# Altium PCB PCB1.PcbDoc
Units mm, origin at the board's own origin, x right, y up, seen from the top; angles counter-clockwise.
Board outline 80.5 x 60.5 mm, 2 copper layers (Top Layer, Bottom Layer); 35 components, 26 nets, 180 pads, 4 vias.
Unrouted connection lines stored in the file: 2.
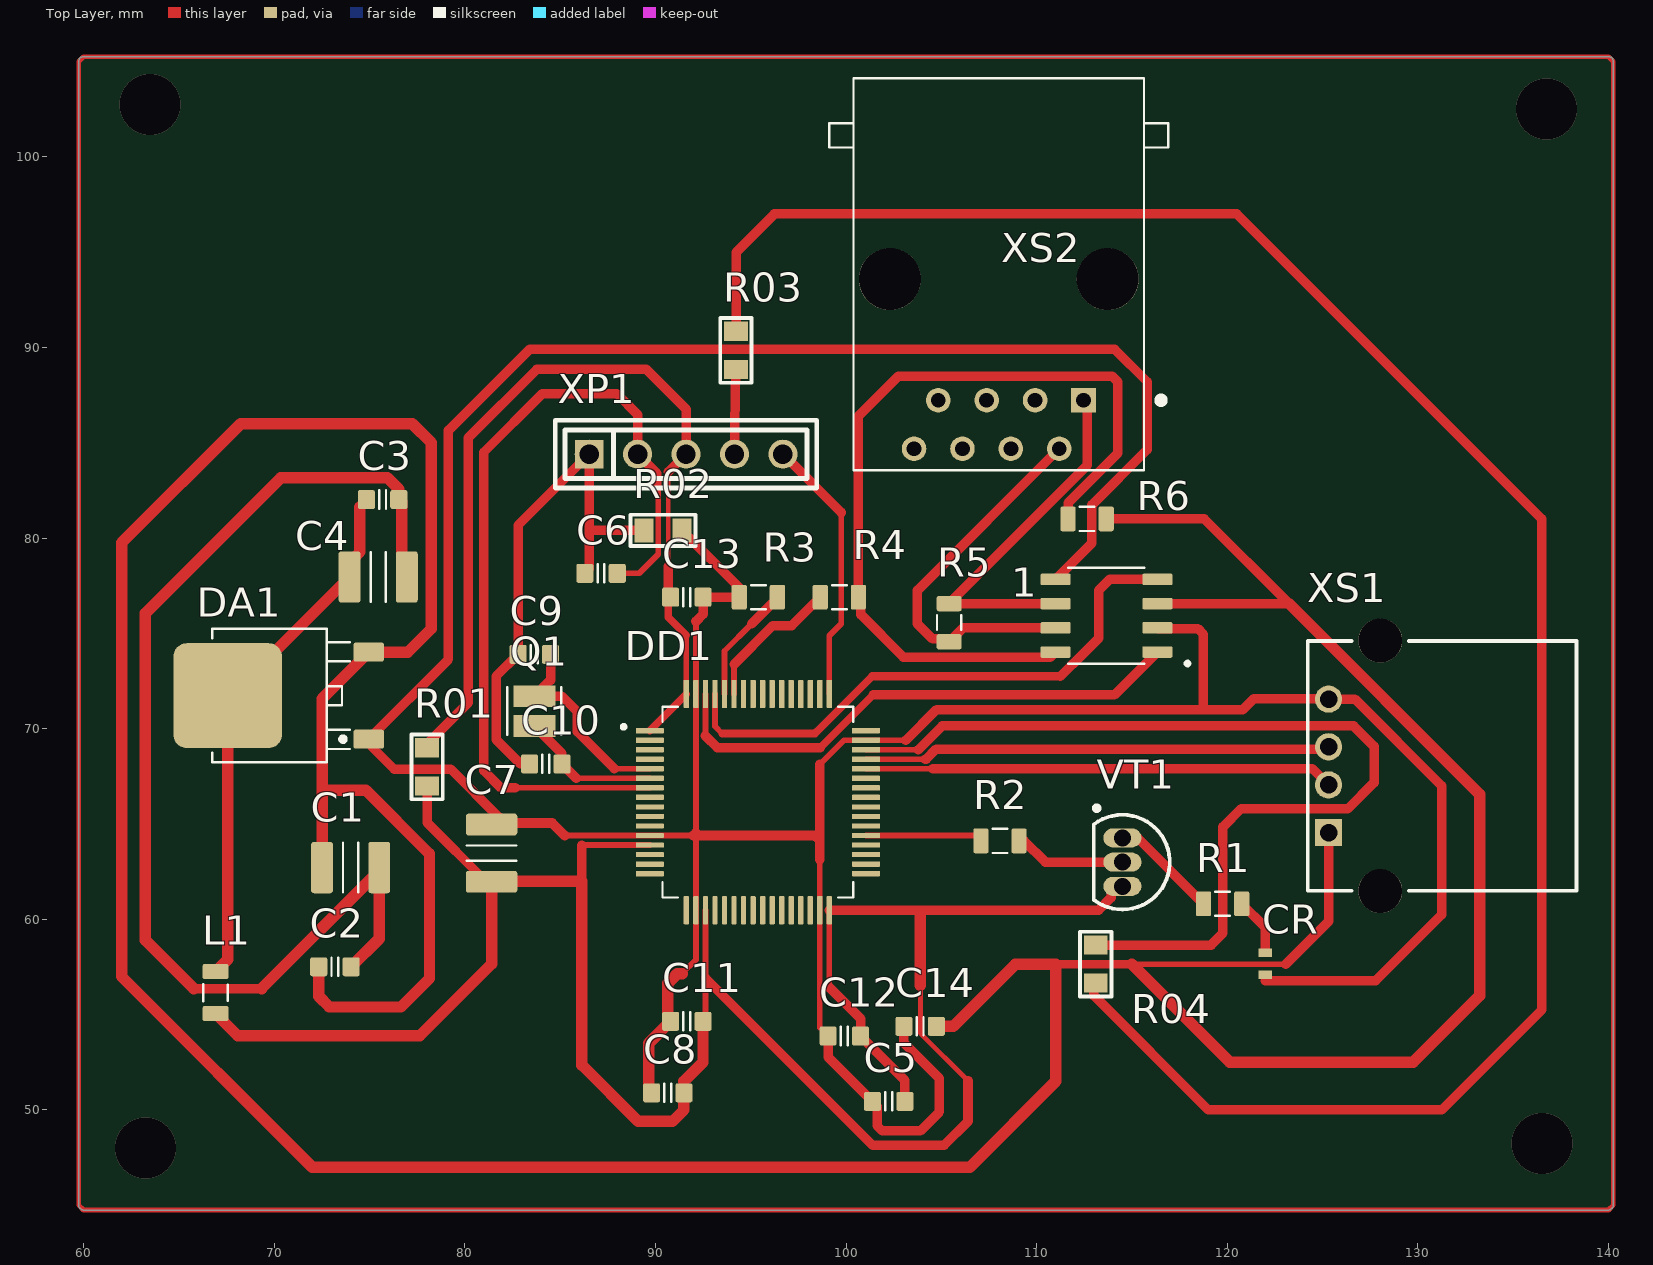
[diagram p0: Top Layer view]
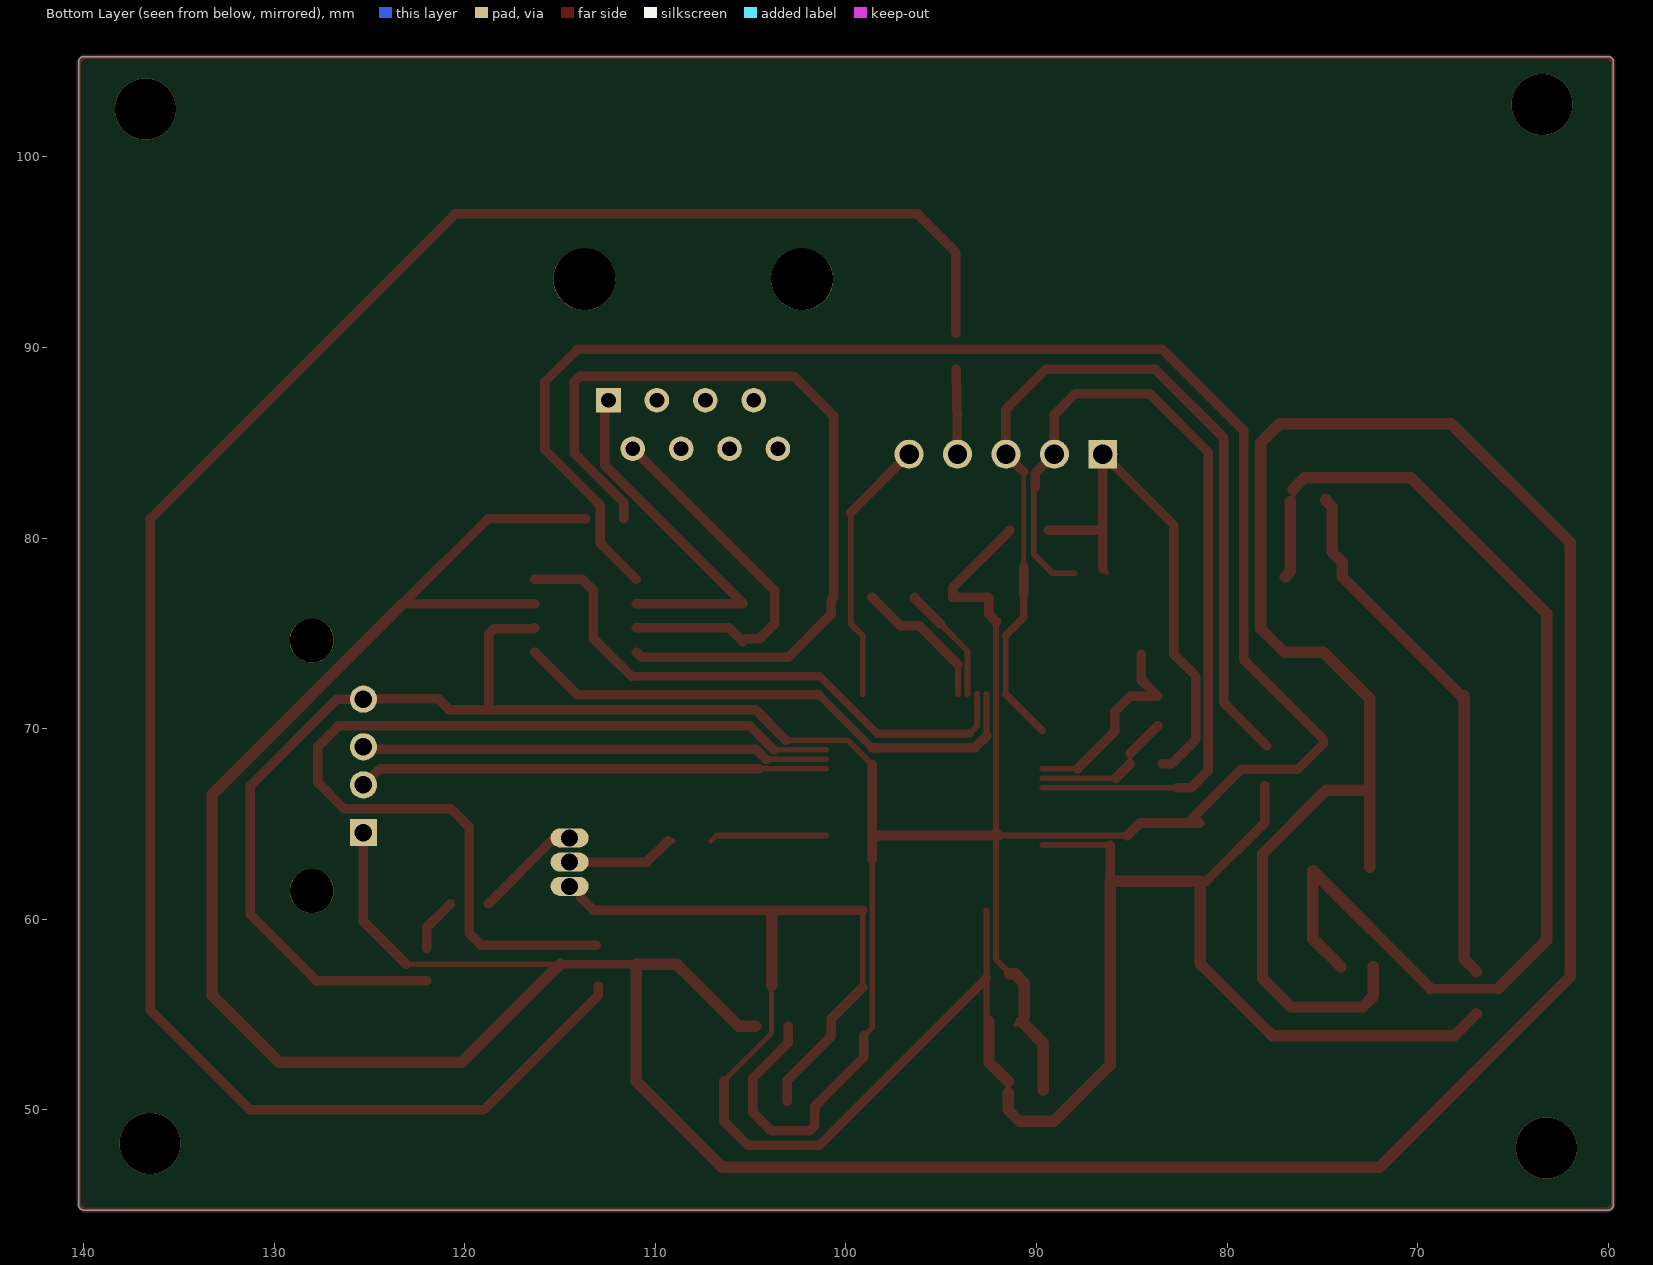
[diagram p1: Bottom Layer view, seen from below]
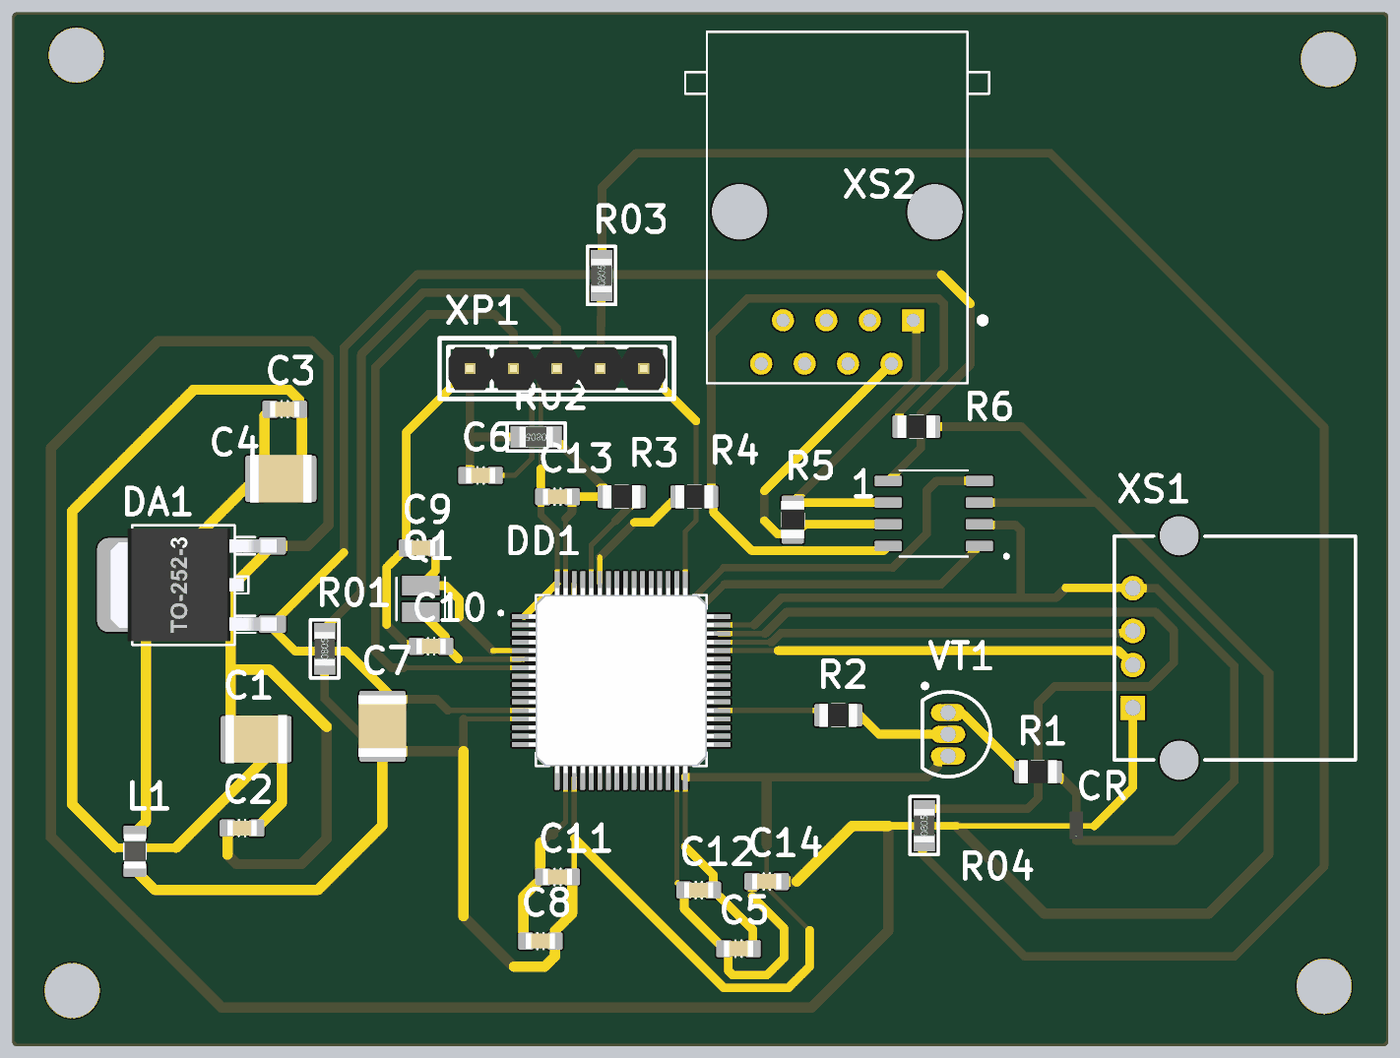
[diagram p2: 3D render of the assembled board from above, using the file's embedded part models]

## Layer stack, top to bottom
Top Solder: solder mask 0.0102, Solder Resist, Dk 3.5
Top Layer: signal copper 0.0356
Dielectric 1: dielectric 0.32, FR-4, Dk 4.8
Bottom Layer: signal copper 0.0356
Bottom Solder: solder mask 0.0102, Solder Resist, Dk 3.5

## Board outline
59.75,45 ccw(c60,45) 60,44.75 140,44.75 ccw(c140,45) 140.25,45 140.25,105 ccw(c140,105) 140,105.25 60,105.25 ccw(c60,105) 59.75,105

## Design rules (kind name [scope] priority, off if disabled: settings)
Clearance [All] p1 off: gap=0.1 ignorepadtopadclearanceinfootprint=FALSE
ComponentClearance [All] p1 off: gap=0.254 collisioncheckmode=3 verticalgap=0.254 showdistances=FALSE
PolygonConnect [All] p1: connectstyle=Relief reliefconductorwidth=0.254 reliefentries=4 polygonreliefangle="90 Angle" airgapwidth=0.254
RoutingVias [All] p1: holewidth=0.711 width=1.27 viastyle="Through Hole" minholewidth=0.711 minwidth=1.27 maxholewidth=0.711 maxwidth=1.27
SolderMaskExpansion [All] p1: expansion=0.102 istentingtop=FALSE
Width [All] p1: maxlimit=1 minlimit=0.254 preferedwidth=0.6
29 further rules are at their usual default settings.

## Components (designator, comment, footprint, x,y, rotation, side; value= is the part's Value field where it differs from the comment)
1 "MCP2551-I/SN" SOIC127P599X175-8N 113.664,75.925 r180 top
C1 "10µ" CAPC3225X220N 74.016,62.717 r0 top
C2 "approved sub OK" CAPC1608X90N#1 73.19,57.51 r0 top value=100n
C3 "approved sub OK" CAPC1608X90N#1 75.691,82.021 r0 top value=100n
C4 "10µ" CAPC3225X220N 75.461,77.957 r0 top
C5 "approved sub OK" CAPC1608X90N#1 102.238,50.45 r0 top value=100n
C6 "approved sub OK" CAPC1608X90N#1 87.15,78.15 r0 top value=100n
C7 "10µ" CAPC3225X220N 81.406,63.471 r90 top
C8 "approved sub OK" CAPC1608X90N#2 90.65,50.9 r180 top value=100n
C9 "18p" CAPC1608X90N#1 83.65,73.9 r180 top
C10 "18p" CAPC1608X90N#1 84.25,68.15 r180 top
C11 "approved sub OK" CAPC1608X90N#1 91.65,54.65 r180 top value=100n
C12 "approved sub OK" CAPC1608X90N#1 99.913,53.879 r180 top value=100n
C13 "approved sub OK" CAPC1608X90N#1 91.65,76.9 r0 top value=100n
C14 "approved sub OK" CAPC1608X90N#1 103.889,54.387 r180 top value=100n
CR "598-8070-107F" LED_DIALIGHT_598_DIA 122,57.672 r90 top
DA1 "Adjustable" TO-252 71.263,71.734 r90 top value=variable
DD1 "STM32F730R8T6" QFP50P1200X1200X160-64N 95.376,66.146 r0 top
L1 "=Value" FBC2012N 66.928,56.156 r270 top
Q1 "D" OSC_XRCHA16M000F0A01R0 83.65,70.925 r90 top (schematic designator Q2)
R01 "Resistor film, , ±5%, 0805, 0.125W, -55...+125°C" "RES: 0805" 78.025,68 r90 top (schematic designator R001)
R1 "Thick Film" RESC2012X70N 119.76,60.812 r0 top value=1K8
R02 "Resistor film, , ±5%, 0805, 0.125W, -55...+125°C" "RES: 0805" 90.4,80.4 r180 top (schematic designator R0000)
R2 "Thick Film" RESC2012X70N 108.076,64.114 r180 top value=1K8
R03 "Resistor film, , ±5%, 0805, 0.125W, -55...+125°C" "RES: 0805" 94.225,89.85 r90 top (schematic designator R00000)
R3 "Thick Film" RESC2012X70N 95.4,76.9 r0 top value=1K8
R04 "Resistor film, , ±5%, 0805, 0.125W, -55...+125°C" "RES: 0805" 113.1,57.65 r90 top (schematic designator R000)
R4 "Thick Film" RESC2012X70N 99.65,76.9 r0 top value=100R
R5 "Thick Film" RESC2012X70N 105.409,75.56 r90 top value=120R
R6 "Thick Film" RESC2012X70N 112.648,81.005 r0 top value=10K
VT1 "2N3906" TO-92A 114.5,63 r180 top (schematic designator Q?)
XP1 "TSW-105-XX-XXX-S" TSW-105-XX-XXX-S 91.61,84.4 r0 top (schematic designator J1)
XS1 "USB-A1HSW6" OST_USB-A1HSW6 131.825,68.051 r90 top (schematic designator P1)
XS2 "RJ45-8L-B" TE_RJ45-8L-B 108.014,93.578 r180 top (schematic designator J)
? "Comment" PLS-5 91.61,84.4 r0 top

## Footprints (in the part's own frame and the unit in brackets; to place one, negate y for a bottom-side part, rotate by r counter-clockwise, add the part's x,y. Pads: shape width x height; smd on the part's side, far side on the other; paste and mask are expansions set on the pad)
CAPC1608X90N#1 [mm]
  round 0.254 on Mech15: 0(0,0)
  rrect25% 0.9x1 smd: 1(-0.85,0) 2(0.85,0)
  Top Layer pour cut-out: -0.6,0.5 -0.4,0.7 0.4,0.7 0.6,0.5 0.6,-0.5 0.4,-0.7 -0.4,-0.7 -0.6,-0.5
  silkscreen extent -0.18,-0.48 0.18,0.48, body extent -0.85,-0.45 0.85,0.45, height 0.89
CAPC1608X90N#2 [mm]
  round 0.254 on Mech15: 0(0,0)
  rrect25% 0.9x1 smd mask+0.102: 1(-0.85,0)
  rrect25% 0.9x1 smd: 2(0.85,0)
  Top Layer pour cut-out: -0.6,0.5 -0.4,0.7 0.4,0.7 0.6,0.5 0.6,-0.5 0.4,-0.7 -0.4,-0.7 -0.6,-0.5
  silkscreen extent -0.18,-0.48 0.18,0.48, body extent -0.85,-0.45 0.85,0.45, height 0.89
CAPC3225X220N [mm]
  round 0.508 on Mech15: 0(0,0)
  rrect25% 1.15x2.7 smd: 1(-1.5,0) 2(1.5,0)
  silkscreen extent -0.4,-1.3 0.4,1.3, body extent -1.8,-1.4 1.8,1.4, height 2.19
FBC2012N [mm]
  round 0.508 on Mech15: 0(0,0)
  rrect25% 0.8x1.35 smd: 1(-1.1,0) 2(1.1,0)
  silkscreen extent -0.43,-0.64 0.46,0.64, body extent -1,-0.62 1,0.63, height 0.9
LED_DIALIGHT_598_DIA [mil]
  rect 17.5x28 smd paste+0 mask+0: 1(-22.75,0) 2(22.75,0)
  body extent -31,-16 32,16, height 28
OSC_XRCHA16M000F0A01R0 [mm]
  rect 1.15x2.2 smd: 1(-0.775,0) 2(0.775,0)
  silkscreen extent -1.25,-1.42 1.25,1.42
OST_USB-A1HSW6 [mm]
  rect 1.428x1.428 hole 0.92: 1(-3.5,6.51)
  round 1.428 hole 0.92: 2(-1,6.51) 3(1,6.51) 4(3.5,6.51)
  round 2.3 hole 2.3 unplated: ""(-6.57,3.8) ""(6.57,3.8)
  silkscreen extent -6.55,-6.5 6.55,7.6
PLS-5 [mm]
  rect 1.5x1.5 hole 1: 1(-5.08,0)
  round 1.5 hole 1: 2(-2.54,0) 3(0,0) 4(2.54,0) 5(5.08,0)
  silkscreen extent -6.35,-1.27 6.35,1.27, body extent -6.35,-1.27 6.35,1.27, height 8.9
QFP50P1200X1200X160-64N [mm]
  rrect25% 1.47x0.28 smd: 1(-5.67,3.75) 2(-5.67,3.25) 3(-5.67,2.75) 4(-5.67,2.25) 5(-5.67,1.75) 6(-5.67,1.25) 7(-5.67,0.75) 8(-5.67,0.25) 9(-5.67,-0.25) 10(-5.67,-0.75) 11(-5.67,-1.25) 12(-5.67,-1.75) 13(-5.67,-2.25) 14(-5.67,-2.75) 15(-5.67,-3.25) 16(-5.67,-3.75) 33(5.67,-3.75) 34(5.67,-3.25) 35(5.67,-2.75) 36(5.67,-2.25) 37(5.67,-1.75) 38(5.67,-1.25) 39(5.67,-0.75) 40(5.67,-0.25) 41(5.67,0.25) 42(5.67,0.75) 43(5.67,1.25) 44(5.67,1.75) 45(5.67,2.25) 46(5.67,2.75) 47(5.67,3.25) 48(5.67,3.75)
  rrect25% 0.28x1.47 smd: 17(-3.75,-5.67) 18(-3.25,-5.67) 19(-2.75,-5.67) 20(-2.25,-5.67) 21(-1.75,-5.67) 22(-1.25,-5.67) 23(-0.75,-5.67) 24(-0.25,-5.67) 25(0.25,-5.67) 26(0.75,-5.67) 27(1.25,-5.67) 28(1.75,-5.67) 29(2.25,-5.67) 30(2.75,-5.67) 31(3.25,-5.67) 32(3.75,-5.67) 49(3.75,5.67) 50(3.25,5.67) 51(2.75,5.67) 52(2.25,5.67) 53(1.75,5.67) 54(1.25,5.67) 55(0.75,5.67) 56(0.25,5.67) 57(-0.25,5.67) 58(-0.75,5.67) 59(-1.25,5.67) 60(-1.75,5.67) 61(-2.25,5.67) 62(-2.75,5.67) 63(-3.25,5.67) 64(-3.75,5.67)
  silkscreen extent -7.14,-5 5,5, body extent -6,-6 6,6, height 0.72
"RES: 0805" [mm]
  rect 1x1.25 smd: 1(-1,0) 2(1,0)
  silkscreen extent -1.7,-0.82 1.7,0.82, body extent -1,-0.6 1,0.6, height 0.44
RESC2012X70N [mm]
  round 0.254 on Mech15: 0(0,0)
  rrect25% 0.8x1.3 smd: 1(-1,0) 2(1,0)
  Top Layer pour cut-out: -0.725,0.65 -0.525,0.85 0.525,0.85 0.725,0.65 0.725,-0.65 0.525,-0.85 -0.525,-0.85 -0.725,-0.65
  silkscreen extent -0.38,-0.64 0.38,0.64, body extent -1.1,-0.67 1.1,0.68, height 0.69
SOIC127P599X175-8N [mm]
  rrect25% 1.58x0.6 smd: 1(-2.67,1.905) 2(-2.67,0.635) 3(-2.67,-0.635) 4(-2.67,-1.905) 5(2.67,-1.905) 6(2.67,-0.635) 7(2.67,0.635) 8(2.67,1.905)
  silkscreen extent -4.35,-2.52 1.99,2.6
TE_RJ45-8L-B [mm]
  rect 1.288x1.288 hole 0.78: 1(-4.445,6.35)
  round 1.288 hole 0.78: 2(-3.175,8.89) 3(-1.905,6.35) 4(-0.635,8.89) 5(0.635,6.35) 6(1.905,8.89) 7(3.175,6.35) 8(4.445,8.89)
  round 3.25 hole 3.25 unplated: ""(-5.715,0) ""(5.715,0)
  silkscreen extent -8.89,-10.54 8.89,10.03
TO-92A [mm] "TO, Flat Index; 3 In-Line, Axial Leads; Body Dia. 4.5mm; Leads 0.51 x 0.48 mm (max)"
  oval 2x1 hole 0.9: 1(0,-1.27) 2(0,0) 3(0,1.27)
  silkscreen extent -2.48,-2.95 1.5,2.48, body extent -2.48,-2.5 1.5,2.5, height 6.86
TO-252 [mm]
  round 0.5 on Mech15: 0(0,0)
  rrect25% 1x1.6 smd: 1(-2.285,-3.7) 3(2.285,-3.7)
  rrect25% 5.5x5.7 smd: 4(0,3.7)
  silkscreen extent -3.5,-2.7 3.5,4.5, body extent -3.3,-3.95 3.3,5.76, height 2.31
TSW-105-XX-XXX-S [mil]
  round 60 hole 40 mask+3: 1(-200,0) 2(-100,0) 3(0,0) 4(100,0) 5(200,0)
  silkscreen extent -270,-70 270,70

## Part data
1: "1/1 Transceiver Half CANbus 8-SOIC", Package="SOIC-8 Microchip", Availability=Unavailable, MF=Microchip, MP=MCP2551-I/SN, Price=None, SnapEDA_Link=https://www.snapeda.com/parts/MCP2551-I/SN/Microchip/view-part/10929/?ref=snap
C1 C4 C7: library part CAPC_10u_1210_50V, "Capacitor SMD Cer 10uF 20% 16V X5R 1210", Manufacturer 1="Taiyo Yuden", Manufacturer Part Number 1=UMK325BJ106MM-T, Package / Case="1210 (3225 Metric)", Ratings="50V; X5R", Supplier Part Number 1=587-2225-1-ND, Tolerance=±20%, Material=ceramic, SCDType=spec, Size / Dimension="0.126\" L x 0.098\" W (3.20mm x 2.50mm)", Supplier 1=Digi-Key
C2 C3 C5 C6 C8 C11 C12 C13 C14: library part CAPC_100n_0603_X7R_50V_10%, "Capacitor SMD Cer 100nF 10% 50V X7R 0603", Manufacturer 1="AVX Corporation", Manufacturer 2="TDK Corporation", Manufacturer Part Number 1=06035C104KAT2A, Manufacturer Part Number 2=C1608X7R1H104K, Package / Case="0603 (1608 Metric)", Ratings="50V; X7R", Supplier Part Number 1=478-5052-1-ND, Tolerance=±10%, ComponentLink1Description=http://www.avx.com/docs/Catalogs/cx7r.pdf, ComponentLink1URL=http://www.avx.com/docs/Catalogs/cx7r.pdf, ComponentLink2Description=http://product.tdk.com/capacitor/mlcc/en/documents/mlcc_commercial_general_en.pdf, ComponentLink2URL=http://product.tdk.com/capacitor/mlcc/en/documents/mlcc_commercial_general_en.pdf, Material=ceramic, SCDType=spec, Supplier 1=Digi-Key, Supplier 2=Digi-Key, Supplier Part Number 2=445-1314-1-ND
C9 C10: library part CAPC_18p_0603_100V, "Capacitor SMD Cer 18pF 2% 100V NP0 0603", Manufacturer 1="AVX Corporation", Manufacturer Part Number 1=06031A180GAT2A, Operating Temperature="-55°C ~ 125°C", Package / Case="0603 (1608 Metric)", Ratings="100V; NP0", Supplier Part Number 1=478-6025-1-ND, Tolerance=±2%, ComponentLink1Description=http://www.avx.com/docs/Catalogs/ccog.pdf, ComponentLink1URL=http://www.avx.com/docs/Catalogs/ccog.pdf, SCDType=spec, Size / Dimension="0.063\" L x 0.032\" W (1.60mm x 0.81mm)", Supplier 1=Digi-Key, Thickness (Max)="0.035\" (0.90mm)"
CR: "No Description Available", Built_By=EMA_UL_Team, Copyright="Copyright (C) 2021 Accelerated Designs. All rights reserved", Manufacturer_Part_Number=598-8070-107F, RefDes=RefDes, SourceLibrary=Dialight_2012-01-01_LED_598, Type=DEV, Vendor=Dialight
DA1: library part LM317MBDTG, "Voltage Regulator IC, DPAK SMD, LM317MBDTG", Manufacturer 1="ON Semiconductor", Package / Case=DPAK/TO-252, Ratings="40V in-out; 500mA", Supplier Part Number 1=LM317MBDTGOS-ND, Tolerance=0.04%, Voltage Regulator Type="Adjustable Positive Linear", Manufacturer Part Number 1=LM317MBDTG, SCDType=spec\, Supplier 1=Digi-Key
DD1: "ARMA® CortexA®-M7 STM32F7 Microcontroller IC 32-Bit 216MHz 64KB (64K x 8) FLASH 64-LQFP (10x10)", Package="LQFP-64 STMicroelectronics", Availability=Good, Check_prices=https://www.snapeda.com/parts/STM32F730R8T6/STMicroelectronics/view-part/3192404/?ref=eda, MF=STMicroelectronics, MP=STM32F730R8T6, Price=None, Purchase-URL=https://pricing.snapeda.com/search/part/STM32F730R8T6/?ref=eda, SnapEDA_Link=https://www.snapeda.com/parts/STM32F730R8T6/STMicroelectronics/view-part/3192404/?ref=snap
L1: library part FERRITE_2K2-100MHz_0805, "Ferrite bead 2.2K Ohm at 100 MHz 200mA 0805 SMD", Current Rating=200mA, DC Resistance (DCR)="800 mOhm Max", Impedance @ Frequency="600 Ohm @ 100MHz", Manufacturer 1="Laird-Signal Integrity Products", Package / Case="0805 (2012 Metric)", Ratings="200 mA; 800 mOhm DC", Supplier Part Number 1=240-2562-1-ND, ComponentLink1Description=http://www.lairdtech.com/WorkArea/linkit.aspx?LinkIdentifier=id&ItemID=4879, ComponentLink1URL=http://www.lairdtech.com/WorkArea/linkit.aspx?LinkIdentifier=id&ItemID=4879, Filter Type="Differential Mode - Single", Height (Max)="0.043\" (1.09mm)", Mounting Type="Surface Mount", SCDType=source, Size / Dimension="0.063\" L x 0.031\" W (1.60mm x 0.80mm)", Supplier 1=Digi-Key
Q1: library part XRCHA16M000F0A01R0, "16MHz A±100ppm Crystal 8pF 100 Ohms 2-SMD, No Lead", Package="SMD-2 Murata", Arrow_Electronics-Purchase-URL=https://snapeda.com/shop?store=Arrow+Electronics&id=4970146, Availability=Good, DigiKey-Purchase-URL=https://snapeda.com/shop?store=DigiKey&id=4970146, MF=Murata, Mouser-Purchase-URL=https://snapeda.com/shop?store=Mouser&id=4970146, MP=XRCHA16M000F0A01R0, Price=None, SnapEDA_Link=https://www.snapeda.com/parts/XRCHA16M000F0A01R0/Murata/view-part/4970146/?ref=snap
R01 R02 R03 R04: library part Resistor_0805, Manufacturer=Yageo, Package=0805, PartNumber=RC0805JR-07100RL, Power=0.125W, Temperature=-55...+125°C, Tolerance=±5%, TypeResistor="Resistor film", ValueManufacturerPartNumber="Resistor film, =Value, ±5%, 0805, 0.125W, -55...+125°C", HelpURL=https://www.digikey.com/product-detail/en/yageo/RC0805JR-07100RL/311-100ARCT-ND/731185
R1 R2 R3: library part RES_1K8_0805_1%, "Resistor SMD chip 1.8k Ohm 0.125W 1% 0805", Manufacturer 1=Vishay/Dale, Manufacturer Part Number 1=CRCW08051K80FKEA, Package / Case="0805 (2012 metric)", Ratings=1/8W, Supplier Part Number 1=541-1.80KCCT-ND, Tolerance=±1%, SCDType=spec, Supplier 1=Digi-Key
R4: library part RES_100R_0805_1%, "Resistor SMD chip 100 Ohm 0.125W 1% 0805", Manufacturer 1=Yageo, Manufacturer Part Number 1=RC0805FR-07100RL, Package / Case="0805 (2012 Metric)", Ratings="1/8 W", Supplier Part Number 1=311-100CRCT-ND, Tolerance=±1%, Material="Thick Film", SCDType=spec, Supplier 1=Digi-Key
R5: library part RES_150R_0805_5%, "Resistor SMD chip 150 Ohm 0.125W 5% 0805", Manufacturer 1=Vishay/Dale, Manufacturer Part Number 1=CRCW0805150RJNEA, Package / Case="0805 (2012 metric)", Ratings=1/8W, Supplier Part Number 1=541-150ACT-ND, Tolerance=±5%, SCDType=spec, Supplier 1=Digi-Key
R6: library part RES_10K_0805_5%, "Resistor SMD chip 10k Ohm 0.125W 5% 0805", Manufacturer 1=Yageo, Manufacturer Part Number 1=RC0805JR-0710KL, Package / Case="0805 (2012 metric)", Ratings="1/8 W", Supplier Part Number 1=311-10KARCT-ND, Tolerance=±5%, Material="Thick Film", SCDType=spec, Supplier 1=Digi-Key
VT1: "PNP General Purpose Amplifier", ComponentLink1Description="Manufacturer Link", ComponentLink1URL=http://www.fairchildsemi.com/, ComponentLink2Description=Datasheet, ComponentLink2URL=http://www.fairchildsemi.com/ds/2N%2F2N3906.pdf, DatasheetVersion=1997, LatestRevisionDate=15-Jan-2003, LatestRevisionNote="PCB Footprint 'BCY-W3/D4.7' replaced", PackageDescription="TO, Flat Index; 3 In-Line, Axial Leads; Body Dia. 4.5mm; Leads 0.51 x 0.48 mm (max)", PackageReference=TO-92A, PackageVersion=Sep-1998, Published=8-Jun-2000, Publisher="Altium Limited"
XP1: "SINGLE ROW .025[0.64] SQ. POST TERMINAL STRIP ASSEMBLY,", Manufacturer=SAMTEC, CREATED BY="July 28, 2014 - Wendy Xin", PCB DECAL=TSW-105-XX-XXX-S
XS1: "USB-A _USB TYPE-A_  Receptacle Connector 4 Position Through Hole, Right Angle", Package=None, Availability=Unavailable, MF="On Shore", MP=USB-A1HSW6, Price=None, SnapEDA_Link=https://www.snapeda.com/parts/USB-A1HSW6/On%20Shore%20Technology%20Inc./view-part/13110/?ref=snap
XS2: "Jack Modular Connector 8p8c _RJ45, Ethernet_ 90A° Angle _Right_ Unshielded", Package=None, Availability=Unavailable, MF="TE Connectivity", MP=RJ45-8L-B, Price=None, SnapEDA_Link=https://www.snapeda.com/parts/RJ45-8L-B/TE%20Connectivity%20Corcom%20Filters/view-part/423036/?ref=snap, TE_purchase_URL=https://www.te.com/usa-en/product-RJ45-8L-B.html?te_bu=Cor&te_type=disp&te_campaign=seda_glo_cor-seda-global-disp-prtnr-fy19-seda-model-bom-cta_sma-317_1&elqCampaignId=32493

## Via types
v1: diameter 3.2, hole 3.2, Top Layer to Bottom Layer, 4 vias

## Nets (pads, with @x,y where several pads share a name; then routed paths per layer and width w, separated by ;. In a path a pad name is that pad's centre, name@x,y a point inside that pad or via, vN(x,y) a via of type N, cw(c..) or ccw(c..) an arc to the next point about the centre after c; other vN are vias at no path point)
3.3v: C5.2 C7.1 C8.1 C11.1 C12.1 C13.1 DD1.1 DD1.13 DD1.19 DD1.32 DD1.64 L1.2 R01.1 R01.2 VT1.3 XP1.3 | length 172
  Top Layer w0.254: 90.673,78.527 90.673,83.463 90.677,83.467 ; C8.1 91.5,51.5 ; 91.61,74.904 91.626,74.888 ; 103.9,56.527 103.9,54.021 106.4,51.521
  Top Layer w0.3: 86.146,63.896 DD1.13 ; DD1.64 91.626,74.888 ; C11.1@92.626,54.633 92.626,56.909 DD1.19 ; 99.126,56.424 DD1.32
  Top Layer w0.4: DD1.1 DD1.64 ; C13.1@90.673,77.027 90.673,75.841 91.61,74.904
  Top Layer w0.5: R01.2@77.925,69.1 80.175,71.35 80.175,85.25 83.775,88.85 89.525,88.85 91.61,86.765 XP1.3 90.677,83.467 ; R01.1 78.025,65.075 81.129,61.971 C7.1 ; 86.146,62.01 86.146,63.896 ; C13.1@90.673,77.027 90.673,78.527 ; 92.636,56.909 101.395,48.15 105.15,48.15 106.4,49.4 106.4,51.521 ; 99.126,56.424 100.763,54.787 C12.1 103.088,51.554 C5.2 ; DD1.32 103.75,60.476 113.246,60.476 113.904,61.134 113.904,61.499 114.135,61.73 VT1.3
  Top Layer w0.6: L1.2 68.084,53.9 77.65,53.9 81.406,57.656 C7.1 81.406,62.003 84.15,62.003 86.139,62.003 86.146,62.01 86.146,52.354 89.1,49.4 90.9,49.4 91.5,50 C8.1 ; 91.5,51.5 92.5,52.5 92.5,54.462 C11.1 ; 103.9,56.527 103.9,60.326
+5V: 1.3 C1.1 C2.1 C14.1 DA1.3 R6.2 XS1.1 | length 243.2
  Top Layer w0.3: 115,57.637 123.062,57.637
  Top Layer w0.44: 111,57.637 115,57.637
  Top Layer w0.5: R6.2 118.795,81.005 123.24,76.56 1.3 ; 123.062,57.637 125.315,59.89 XS1.1
  Top Layer w0.6: C2.1 72.34,55.96 72.9,55.4 76.65,55.4 78.15,56.9 78.15,63.433 74.802,66.781 72.516,66.781 ; C1.1 72.516,66.781 ; C14.1 105.637,54.387 108.887,57.637 111,57.637 111,51.5 106.5,47 72,47 62,57 62,79.75 68.25,86 77.25,86 78.25,85 78.25,75.25 77.019,74.019 DA1.3 72.516,71.572 72.516,66.781 ; 115,57.637 120.137,52.5 129.75,52.5 133.25,56 133.25,66.55 123.24,76.56
D+: DD1.45 XS1.3 | length 24.5
  Top Layer w0.3: DD1.45 104.146,68.396
  Top Layer w0.5: 104.146,68.396 104.199,68.396 104.731,68.928 125.192,68.928 XS1.3
D-: DD1.44 XS1.2 | length 24.6
  Top Layer w0.3: DD1.44 104.548,67.896
  Top Layer w0.5: 104.548,67.896 124.47,67.896 XS1.2
GND: 1.2 1.5 C5.1 C6.1 C7.2 C8.2 C9.2 C10.2 C11.2 C12.2 C13.2 C14.2 CR.1 DA1.1 DD1.12 DD1.18 DD1.31 DD1.47 DD1.63 R02.1 R02.2 R3.1 XP1.1 XS1.4 | length 248.3
  Top Layer w0.254: C6.1 C6.1@86.53,78.38 ; C8.2@89.65,51.05 C8.2 ; C11.2@90.65,54.909 C11.2@91.097,54.462 ; C12.2@98.626,54.316 C12.2
  Top Layer w0.3: 85.239,64.396 DD1.12 91.993,64.396 ; 91.4,57.15 92.126,57.876 DD1.18 92.126,64.396 92.126,64.529 DD1.63 92.126,75.626 ; C12.2@98.626,54.316 DD1.31 98.626,63.126 ; 98.626,68.126 99.896,69.396 DD1.47 103.146,69.396
  Top Layer w0.5: C10.2 82.925,68.15 81.65,69.425 81.65,72.75 C9.2 82.8,80.67 XP1.1 86.53,80.4 C6.1@86.53,78.38 ; 85.239,64.396 84.582,65.053 81.456,65.053 81.777,65.373 79.275,67.875 76.3,67.875 74.963,69.212 DA1.1 79.145,73.631 79.145,85.645 83.4,89.9 114.1,89.9 115.8,88.2 115.8,84.643 112.898,81.741 112.898,79.734 1.5 ; 86.53,80.28 86.65,80.4 R02.2 ; R02.1 94.4,77.4 R3.1 C13.2 92.5,76 92.126,75.626 ; 91.993,64.396 92.126,64.529 92.258,64.397 98.353,64.397 98.626,64.124 ; 98.626,63.126 98.626,64.124 ; 98.626,68.126 98.626,64.124 ; C12.2 99.063,52.775 C5.1 101.638,50.2 101.638,49.162 101.9,48.9 103.9,48.9 104.9,49.9 104.9,51.65 103.039,53.511 C14.2 ; 103.146,69.396 104.75,71 117.5,71 117.69,71 118.75,71 ; 1.2 116.378,75.246 118.457,75.246 118.75,74.953 118.75,71 ; 122,56.787 127.787,56.787 131.25,60.25 131.25,67 126.699,71.551 XS1.4 125.286,71.58 121.4,71.58 120.82,71 118.75,71
  Top Layer w0.6: C8.2@89.65,51.05 89.65,53.5 C11.2 ; C11.2@90.65,54.909 90.65,56.65 91.15,57.15 91.4,57.15
Net1_6: 1.6 R5.2 XS2.1 | length 19.3
  Top Layer w0.254: XS2.1 XS2.1@112.65,87.037
  Top Layer w0.5: 1.6 R5.2 105.409,76.573 112.65,83.814 XS2.1@112.65,87.037
Net1_7: 1.7 R5.1 XS2.2 | length 20.2
  Top Layer w0.5: 1.7 106.139,75.29 R5.1 105.259,74.71 104.54,74.71 103.75,75.501 103.75,77.248 XS2.2
NetC1_2: C1.2 C2.2 C3.2 C4.2 | length 60.1
  Top Layer w0.254: C1.2@75.516,62.542 C1.2 ; 76.541,82.568 C3.2 76.581,82.021 C3.2@76.691,81.91
  Top Layer w0.5: 65.785,56.367 69.341,56.367
  Top Layer w0.6: 65.785,56.367 63.25,58.902 63.25,76.057 70.357,83.164 75.945,83.164 76.541,82.568 ; 69.341,56.367 75.516,62.542 75.516,58.986 C2.2 ; C3.2@76.691,81.91 76.691,78.227 C4.2
NetC3_1: C3.1 C4.1 DA1.4 L1.1 | length 28.1
  Top Layer w0.254: DA1.4 DA1.4@67.738,71.734
  Top Layer w0.6: L1.1 67.563,57.891 DA1.4 ; DA1.4@67.738,71.734 C4.1 73.961,78.732 74.5,79.271 74.5,81.63 74.841,81.971 C3.1
NetC9_1: C9.1 DD1.5 Q1.2 | length 10.8
  Top Layer w0.3: 87.854,67.896 DD1.5
  Top Layer w0.5: C9.1 84.5,72.55 Q1.2 85.1,71.7 85.9,70.9 85.9,69.85 87.854,67.896
NetC10_1: C10.1 DD1.6 Q1.1 | length 7.5
  Top Layer w0.254: C10.1 85.1,68.7
  Top Layer w0.3: 85.854,67.396 DD1.6
  Top Layer w0.5: Q1.1 85.1,68.7 ; C10.1 85.854,67.396
NetCR_2: CR.2 R1.2 | length 2.8
  Top Layer w0.5: R1.2 122,59.572 122,58.487
NetDD1_37: DD1.37 R2.2 | length 6.1
  Top Layer w0.254: R2.2@106.794,64.396 R2.2
  Top Layer w0.3: DD1.37 R2.2@106.794,64.396
NetDD1_46: DD1.46 R04.2 | length 50.9
  Top Layer w0.3: DD1.46 103.796,68.896
  Top Layer w0.5: 103.796,68.896 105.05,70.15 126.625,70.15 127.7,69.075 127.7,67.175 126.325,65.8 120.725,65.8 119.775,64.85 119.775,59.275 119.15,58.65 R04.2
NetDD1_59: DD1.59 R4.1 | length 7.5
  Top Layer w0.3: DD1.59 94.126,73.376
  Top Layer w0.5: 94.126,73.376 96.15,75.4 97.15,75.4 R4.1
NetDD1_60: DD1.60 R3.2 | length 6.2
  Top Layer w0.3: DD1.60 93.626,74.074 95.052,75.5
  Top Layer w0.5: 95.052,75.5 96.4,76.848 R3.2
NetJ1_4: R03.1 XP1.4 | length 4.5
  Top Layer w0.5: XP1.4 R03.1
NetQ?_1: R1.1 VT1.1 | length 5.6
  Top Layer w0.5: VT1.1@114.553,64.25 115.322,64.25 R1.1
NetQ?_2: R2.1 VT1.2 | length 5.9
  Top Layer w0.254: R2.1 R2.1@109.346,64.114
  Top Layer w0.5: R2.1@109.346,64.114 110.46,63 VT1.2 VT1.2@114.553,63
NetR000_1: R03.2 R04.1 | length 108.4
  Top Layer w0.5: R03.2@94.25,90.75 94.25,95 96.25,97 120.5,97 136.5,81 136.5,55.25 131.25,50 119,50 113,56 R04.1@113,56.5
NRST: C6.2 DD1.7 XP1.2 | length 45.9
  Top Layer w0.3: 82.654,66.896 DD1.7 ; C6.2 89.15,78.15 90.15,79.15 90.15,82.625 90.077,82.697
  Top Layer w0.5: 82.654,66.896 81.904,66.896 81,67.8 81,84.5 84.075,87.575 87.975,87.575 89.07,86.48 XP1.2 90.077,83.393 90.077,82.697
RS: 1.8 R4.2 R6.1 | length 44.6
  Top Layer w0.5: 1.8 110.724,73.75 103.012,73.75 100.782,75.98 100.782,76.768 R4.2 100.65,86.4 102.75,88.5 113.957,88.5 114.25,88.207 114.25,84.443 111.648,81.841 R6.1
RXD: 1.4 DD1.61 | length 29.9
  Top Layer w0.3: DD1.61 93.126,70.124 93.5,69.75
  Top Layer w0.4: 93.5,69.75 98.374,69.75 98.648,70.024 101.374,72.75
  Top Layer w0.45: 101.374,72.75 111.25,72.75
  Top Layer w0.5: 111.25,72.75 111.87,73.37 111.885,73.37 113.25,74.735 113.25,77.25 113.83,77.83 1.4
SWCLK: DD1.49 XP1.5 | length 14.1
  Top Layer w0.3: DD1.49 99.126,74.876 99.75,75.5 99.75,81.34
  Top Layer w0.5: XP1.5 99.75,81.34
TXD: 1.1 DD1.62 | length 28.2
  Top Layer w0.3: 92.626,69.624 DD1.62
  Top Layer w0.4: 98.649,69 101.418,71.769
  Top Layer w0.5: 92.626,69.624 93.25,69 98.649,69 ; 101.418,71.769 114.083,71.769 1.1
VBUS: DD1.42
pads on no net: ?.1 ?.2 ?.3 ?.4 ?.5 C1.0 C2.0 C3.0 C4.0 C5.0 C6.0 C7.0 C8.0 C9.0 C10.0 C11.0 C12.0 C13.0 C14.0 DA1.0 DD1.2 DD1.3 DD1.4 DD1.8 DD1.9 DD1.10 DD1.11 DD1.14 DD1.15 DD1.16 DD1.17 DD1.20 DD1.21 DD1.22 DD1.23 DD1.24 DD1.25 DD1.26 DD1.27 DD1.28 DD1.29 DD1.30 DD1.33 DD1.34 DD1.35 DD1.36 DD1.38 DD1.39 DD1.40 DD1.41 DD1.43 DD1.48 DD1.50 DD1.51 DD1.52 DD1.53 DD1.54 DD1.55 DD1.56 DD1.57 DD1.58 L1.0 R1.0 R2.0 R3.0 R4.0 R5.0 R6.0 XS1. XS2. XS2.3 XS2.4 XS2.5 XS2.6 XS2.7 XS2.8
copper on no net: | length 281.4
  Top Layer w0.254: 59.75,45 60,44.75 140,44.75 140.25,45 140.25,105 140,105.25 60,105.25 59.75,105 59.75,45
  other v1: 63.25,48 136.5,48.25 136.75,102.5 63.5,102.75

## Text inside footprints (layer, text, board x,y; h text height)
XP1: Mechanical 1 "J1" at 91.164,83.943 h0.76